# Altium PCB AbraSchematicVer5.PcbDoc
Units mil, origin at the board's own origin, x right, y up, seen from the top; angles counter-clockwise.
Board outline 3966.96 x 3797.83 mil, 2 copper layers (Top, Bottom), stack 61.811 mil thick; 89 components, 89 nets, 470 pads, 123 vias.
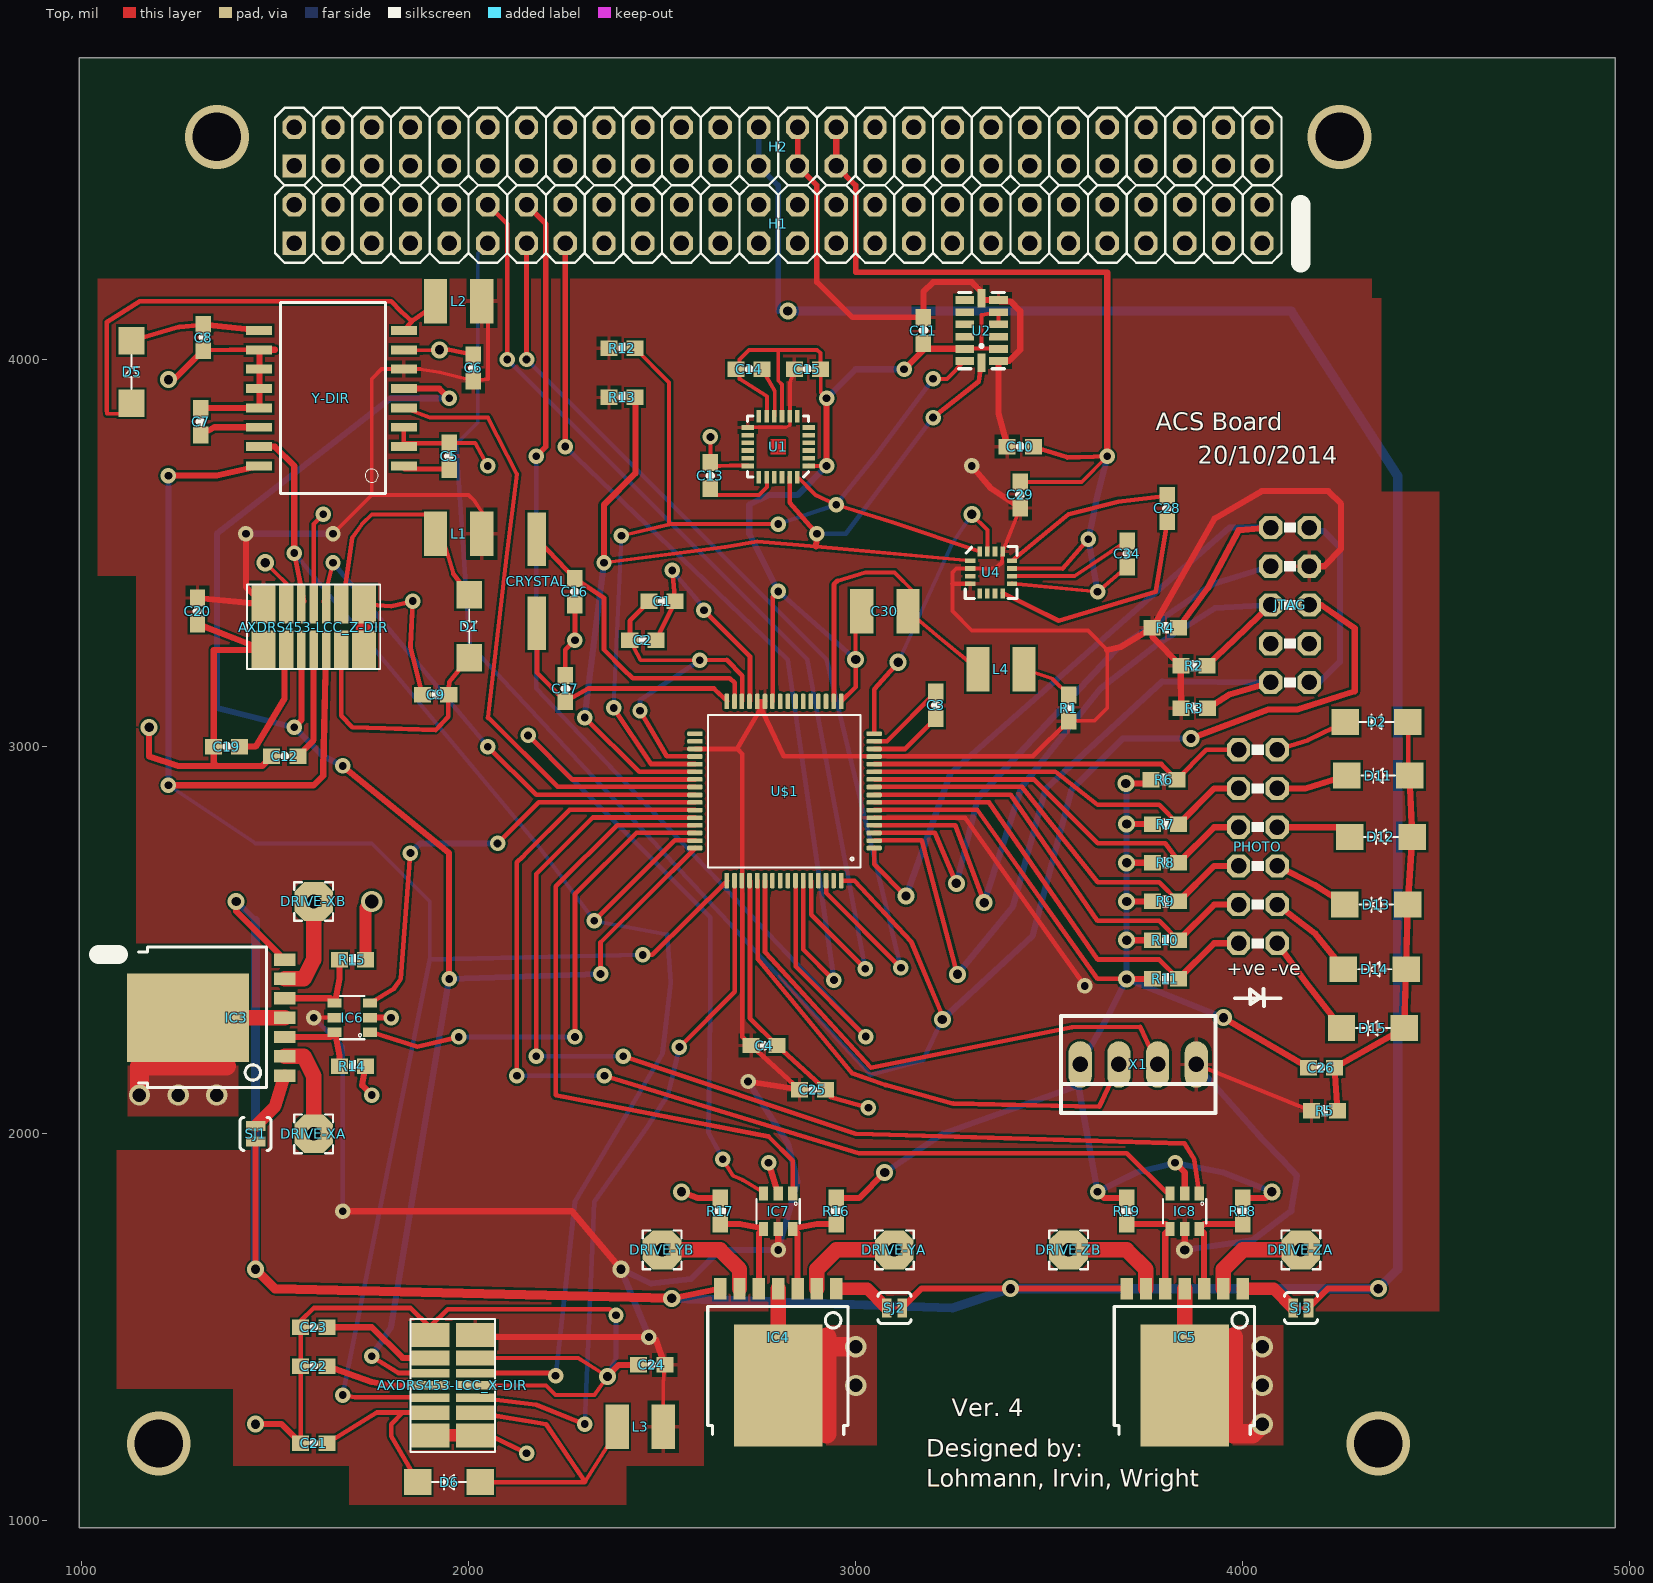
[diagram p0: Top view]
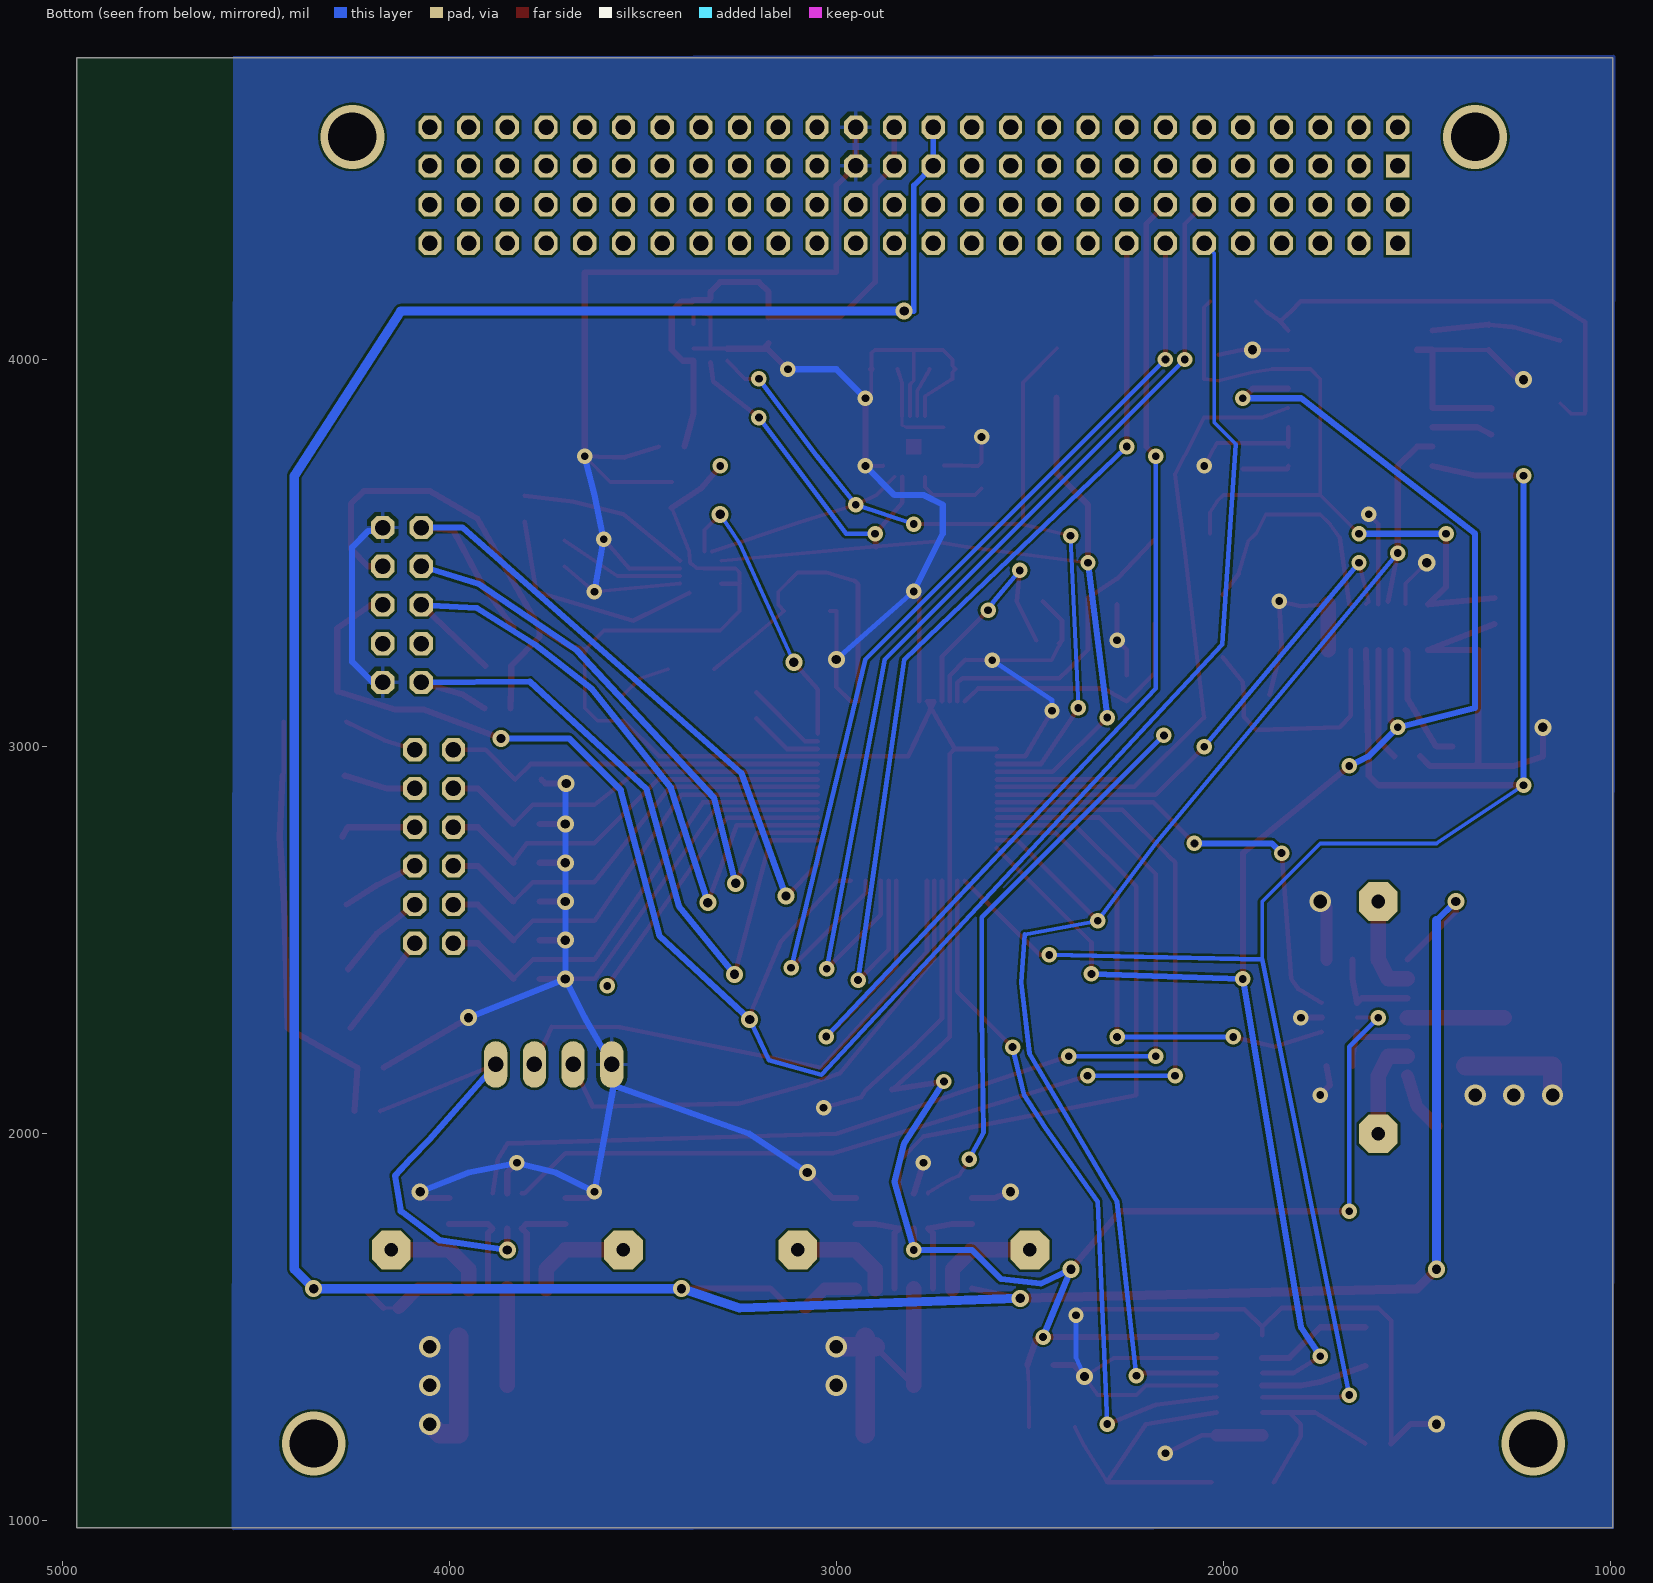
[diagram p1: Bottom view, seen from below]

## Layer stack, top to bottom
Top Solder: solder mask 0.4, Solder Resist, Dk 3.5
Top: signal copper 1.378
Dielectric 1: core 59.0551, FR-4, Dk 4.8
Bottom: signal copper 1.378
Bottom Solder: solder mask 0.4, Solder Resist, Dk 3.5

## Board outline
995,982.17 4961.96,982.17 4961.96,4780 995,4780

## Design rules (kind name [scope] priority, off if disabled: settings)
Clearance mdViaVia [IsVia vs IsVia] p1: gap=8
Clearance mdPadVia [IsPad vs IsVia] p2: gap=8
Clearance mdPadPad [IsPad vs IsPad] p3: gap=6
Clearance mdWireVia [(InLayerClass('Signal Layers') AND IsTrack) vs IsVia] p4: gap=8
Clearance mdWirePad [(InLayerClass('Signal Layers') AND IsTrack) vs IsPad] p5: gap=6
Clearance mdWireWire [(InLayerClass('Signal Layers') AND IsTrack) vs (InLayerClass('Signal Layers') AND IsTrack)] p6: gap=6
Clearance [All] p7: gap=6
HoleSize [All] p1: absolutevalues=TRUE maxlimit=100000 minlimit=15 maxpercent=80.000 minpercent=20.000
HoleToHoleClearance [All] p1: gap=8 allowstackedmicrovias=TRUE
PolygonConnect ThermalVias [IsVia] p1: connectstyle=Direct reliefconductorwidth=10 reliefentries=4 polygonreliefangle="90 Angle" airgapwidth=10
PolygonConnect [All] p2: connectstyle=Relief reliefconductorwidth=10 reliefentries=4 polygonreliefangle="90 Angle" airgapwidth=10
RoutingVias [All] p1: holewidth=28 width=50 viastyle="Through Hole" minholewidth=28 minwidth=50 maxholewidth=28 maxwidth=50
SilkToSilkClearance [All] p1 off: silktosilkclearance=10
SilkToSolderMaskClearance [IsPad] p1 off: minsilkscreentomaskgap=10 clearancetoexposedcopper=TRUE
SolderMaskExpansion [All] p1: expansion=4
Width [All] p1: maxlimit=100000 minlimit=8 preferedwidth=10
25 further rules are at their usual default settings.

## Components (designator, comment, footprint, x,y, rotation, side; value= is the part's Value field where it differs from the comment)
AXDRS453-LCC_X-DIR "" ADX-VERT 1850,1350 r270 top
AXDRS453-LCC_Z-DIR "" ADX-VERT 1600,3200 r0 top
C1 "470pF" 0603-CAP 2500,3375 r0 top
C2 "2.2uF" 0603-CAP 2450,3275 r0 top
C3 "0.1uF" 0603-CAP 3207,3107 r270 top
C4 "4.7uF" 0603-CAP 2764,2228 r180 top
C5 "1uF" 0603-CAP 1950,3750 r90 top
C6 "1uF" 0603-CAP 2012,3978 r90 top
C7 "1uF" 0603-CAP 1308,3839 r90 top
C8 "100nF" 0603-CAP 1315,4057 r270 top
C9 "100nF" 0603-CAP 1915,3134 r0 top
C10 "0.1uF" 0603-CAP 3425,3775 r0 top
C11 "0.1uF" 0603-CAP 3175,4075 r270 top
C12 "1uF" 0603-CAP 1525,2975 r0 top
C13 "2.2nF" 0603-CAP 2625,3700 r90 top
C14 "0.1uF" 0603-CAP 2725,3975 r180 top
C15 "10nF" 0603-CAP 2875,3975 r0 top
C16 "470pF" 0603-CAP 2275,3400 r90 top
C17 "2.2uF" 0603-CAP 2250,3150 r270 top
C19 "1uF" 0603-CAP 1375,3000 r0 top
C20 "1uF" 0603-CAP 1300,3350 r90 top
C21 "100nF" 0603-CAP 1600,1200 r0 top
C22 "1uF" 0603-CAP 1600,1400 r0 top
C23 "1uF" 0603-CAP 1600,1500 r0 top
C24 "1uF" 0603-CAP 2473,1403 r0 top
C25 "1nF" 0603-CAP 2889,2114 r180 top
C26 "0.1uF" 0603-CAP 4203,2171 r0 top
C28 "0.22uF" 0603-CAP 3805,3615 r90 top
C29 "0.1uF" 0603-CAP 3425,3650 r90 top
C30 "47uF" C1210K 3075,3350 r0 top
C34 "4.7uF" 0603-CAP 3702,3498 r270 top
CRYSTAL "" CSM-3X_SMD 2200,3250 r90 top
D1 "GF1" SMA-DO214AC 2002,3311 r270 top
D2 "" SMA-DO214AC 4346,3064 r180 top
D5 "GF1" SMA-DO214AC 1130,3968 r90 top
D6 "" SMA-DO214AC 1950,1100 r180 top
D11 "" SMA-DO214AC 4350,2925 r180 top
D12 "" SMA-DO214AC 4357,2767 r180 top
D13 "" SMA-DO214AC 4345,2592 r180 top
D14 "" SMA-DO214AC 4341,2425 r180 top
D15 "" SMA-DO214AC 4336,2273 r180 top
DRIVE-XA "" PAD-22G 1600,2000 r180 top
DRIVE-XB "" PAD-22G 1600,2600 r0 top
DRIVE-YA "" PAD-22G 3100,1700 r270 top
DRIVE-YB "" PAD-22G 2500,1700 r90 top
DRIVE-ZA "" PAD-22G 4150,1700 r270 top
DRIVE-ZB "" PAD-22G 3550,1700 r90 top
H1 "PINHD-2X26" HEADER-2X26 2750,4350 r0 top
H2 "PINHD-2X26" HEADER-2X26 2750,4550 r0 top
IC3 "BD6212HFP" HRP7 1325,2300 r90 top
IC4 "BD6212HFP" HRP7 2800,1400 r180 top
IC5 "BD6212HFP" HRP7 3850,1400 r180 top
IC6 "SN74LVC1G18-SOT23" SOT23-6 1700,2300 r90 top
IC7 "SN74LVC1G18-SOT23" SOT23-6 2800,1800 r180 top
IC8 "SN74LVC1G18-SOT23" SOT23-6 3850,1800 r180 top
JTAG "" FE05-2W 4122,3366 r90 top
L1 "470uH" C1210K 1975,3550 r180 top
L2 "470uH" C1210K 1975,4150 r180 top
L3 "470uH" C1210K 2443,1243 r0 top
L4 "470uH" C1210K 3375,3200 r0 top
PHOTO "" FE06-2W 4039,2742 r270 top
R1 "100" 0603-RES 3550,3100 r270 top
R2 "4.7k" 0603-RES 3874,3209 r180 top
R3 "4.7k" 0603-RES 3875,3099 r180 top
R4 "4.7k" 0603-RES 3800,3307 r180 top
R5 "15K" 0603-RES 4211,2059 r0 top
R6 "15k" 0603-RES 3796,2915 r0 top
R7 "15k" 0603-RES 3800,2800 r0 top
R8 "15k" 0603-RES 3800,2700 r0 top
R9 "15k" 0603-RES 3800,2600 r0 top
R10 "15k" 0603-RES 3800,2500 r0 top
R11 "15k" 0603-RES 3800,2400 r0 top
R12 "4.7k" 0603-RES 2397,4029 r180 top
R13 "4.7k" 0603-RES 2397,3902 r180 top
R14 "4.7k" 0603-RES 1700,2175 r0 top
R15 "4.7k" 0603-RES 1700,2450 r0 top
R16 "4.7k" 0603-RES 2950,1800 r90 top
R17 "4.7k" 0603-RES 2650,1800 r90 top
R18 "4.7k" 0603-RES 4000,1800 r90 top
R19 "4.7k" 0603-RES 3700,1800 r90 top
SJ1 "SOLDERJUMPERTRACE" SJ_2S-TRACE 1450,2000 r270 top
SJ2 "SOLDERJUMPERTRACE" SJ_2S-TRACE 3100,1550 r0 top
SJ3 "SOLDERJUMPERTRACE" SJ_2S-TRACE 4150,1550 r0 top
U1 "ITG-3200" QFN-24 2800,3775 r180 top
U2 "ADXL345" LGA14 3325,4075 r270 top
U4 "HMC5883LSMD" 16LPCC 3350,3450 r0 top
U$1 "" TQFP64-CORRECT 2816,2885 r180 top
X1 "" 22-23-2041 3730,2179 r180 top
Y-DIR "" N5 1650,3900 r90 top

## Footprints (in the part's own frame and the unit in brackets; to place one, negate y for a bottom-side part, rotate by r counter-clockwise, add the part's x,y. Pads: shape width x height; smd on the part's side, far side on the other; paste and mask are expansions set on the pad)
16LPCC [mil] "16LPCC"
  rect 26x12 smd: 1(-53.94,30) 2(-53.94,10) 3(-53.94,-9.84) 4(-53.94,-29.53) 9(54,-29.53) 10(54,-9.84) 11(54,10) 12(54,30)
  rect 12x26 smd: 5(-29.53,-53.94) 6(-9.84,-53.94) 7(10,-53.94) 8(30,-53.94) 13(30,54) 14(10,54) 15(-9.84,54) 16(-29.53,54)
  silkscreen extent -67,-67 67,67
22-23-2041 [mil] "22-23-2041"
  oval 60x120 hole 40: 1(-150,0) 2(-50,0) 3(50,0) 4(150,0)
  silkscreen extent -200,-125 200,125
0603-CAP [mil] "0603-CAP"
  rect 44x40 smd: 1(-33.46,0) 2(34,0)
  silkscreen extent 0,-1 0,2
0603-RES [mil] "0603-RES"
  rect 44x40 smd: 1(-33.46,0) 2(34,0)
  silkscreen extent -9,-15 9,15
ADX-VERT [mil] "ADX-VERT"
  rect 62x101 smd: 1(-129.92,50) 7(130,50) 8(130,168) 14(-129.92,168)
  rect 38x101 smd: 2(-70.87,50) 6(71,50) 9(71,168) 13(-70.87,168)
  rect 22x101 smd: 3(-31.5,50) 4(0,50) 5(32,50) 10(32,168) 11(0,168) 12(-31.5,168)
  silkscreen extent -172,0 172,219
C1210K [mil] "C1210K"
  rect 60x115 smd: 1(-59.06,0) 2(60,0)
CSM-3X_SMD [mil] "CSM-3X_SMD"
  rect 138x48 smd: P$1(286,24) P$2(69,24)
FE05-2W [mil] "FE05-2W"
  oct 60x60 hole 40: 1(-200,50) 2(-200,-50) 3(-100,50) 4(-100,-50) 5(0,50) 6(0,-50) 7(100,50) 8(100,-50) 9(200,50) 10(200,-50)
  silkscreen extent -213,-16 213,16
FE06-2W [mil] "FE06-2W"
  oct 60x60 hole 40: 1(-250,50) 2(-250,-50) 3(-150,50) 4(-150,-50) 5(-50,50) 6(-50,-50) 7(50,50) 8(50,-50) 9(150,50) 10(150,-50) 11(250,50) 12(250,-50)
  silkscreen extent -263,-16 263,16
HEADER-2X26 [mil] "HEADER-2X26"
  rect 60x60 hole 40: 1(-1200,-50)
  oct 60x60 hole 40: 2(-1200,50) 3(-1100,-50) 4(-1100,50) 5(-1000,-50) 6(-1000,50) 7(-900,-50) 8(-900,50) 9(-800,-50) 10(-800,50) 11(-700,-50) 12(-700,50) 13(-600,-50) 14(-600,50) 15(-500,-50) 16(-500,50) 17(-400,-50) 18(-400,50) 19(-300,-50) 20(-300,50) 21(-200,-50) 22(-200,50) 23(-100,-50) 24(-100,50) 25(0,-50) 26(0,50) 27(100,-50) 28(100,50) 29(200,-50) 30(200,50) 31(300,-50) 32(300,50) 33(400,-50) 34(400,50) 35(500,-50) 36(500,50) 37(600,-50) 38(600,50) 39(700,-50) 40(700,50) 41(800,-50) 42(800,50) 43(900,-50) 44(900,50) 45(1000,-50) 46(1000,50) 47(1100,-50) 48(1100,50) 49(1200,-50) 50(1200,50) 51(1300,-50) 52(1300,50)
  silkscreen extent -1250,-100 1350,100
HRP7 [mil] "HRP7"
  rect 32x56 smd: 1(-150,-200) 2(-100,-200) 3(-50,-200) 4(0,-200) 5(50,-200) 6(100,-200) 7(150,-200)
  rect 229x315 smd: P(0,50)
  silkscreen extent -180,-154 182,177
LGA14 [mil] "LGA14"
  rect 20x48 smd: 1(79,44) 2(48,44) 3(16,44) 4(-15.75,44) 5(-47.24,44) 6(-78.74,44) 8(-78.74,-43.31) 9(-47.24,-43.31) 10(-15.75,-43.31) 11(16,-43.31) 12(48,-43.31) 13(79,-43.31)
  rect 48x20 smd: 7(-82.68,0) 14(83,0)
  silkscreen extent -98,-59 99,60
N5 [mil] "N5"
  rect 23x67 smd: 1(-175,-182.87) 2(-125,-182.87) 3(-75,-182.87) 4(-25,-182.87) 5(25,-182.87) 6(75,-182.87) 7(125,-182.87) 8(175,-182.87) 9(175,191) 10(125,191) 11(75,191) 12(25,191) 13(-25,191) 14(-75,191) 15(-125,191) 16(-175,191)
  silkscreen extent -246,-136 247,136
PAD-22G [mil] "PAD-22G"
  oct 100x100 hole 35: 1(0,0)
  silkscreen extent -50,-50 50,50
QFN-24 [mil] "QFN-24"
  rect 32x12 smd: 1(-78.74,50) 2(-78.74,30) 3(-78.74,10) 4(-78.74,-9.84) 5(-78.74,-29.53) 6(-78.74,-49.21) 13(79,-49.21) 14(79,-29.53) 15(79,-9.84) 16(79,10) 17(79,30) 18(79,50)
  rect 12x32 smd: 7(-49.21,-78.74) 8(-29.53,-78.74) 9(-9.84,-78.74) 10(10,-78.74) 11(30,-78.74) 12(50,-78.74) 19(50,79) 20(30,79) 21(10,79) 22(-9.84,79) 23(-29.53,79) 24(-49.21,79)
  Top region: -19.68,-19.68 20,-19.68 20,20 -19.68,20
  silkscreen extent -79,-79 79,79
SJ_2S-TRACE [mil] "SJ_2S-TRACE"
  rect 25x50 smd: 1(-20,0) 2(20,0)
  Top lines w8: 15,0 -15,0
  silkscreen extent -43,-40 43,40
SMA-DO214AC [mil] "SMA-DO214AC"
  rect 71x67 smd: A(-80.71,0) K(81,0)
  silkscreen extent -44,-19 44,19
SOT23-6 [mil] "SOT23-6"
  rect 24x36 smd: 1(-37.4,-45.28) 2(0,-45.28) 3(38,-45.28) 4(38,46) 5(0,46) 6(-37.4,46)
  silkscreen extent -56,-31 56,31
TQFP64-CORRECT [mil] "TQFP64-CORRECT"
  rrect50% 40x12 smd: 1(-231.69,147) 2(-231.69,128) 3(-231.69,108) 4(-231.69,88) 5(-231.69,69) 6(-231.69,49) 7(-231.69,29) 8(-231.69,10) 9(-231.69,-10.63) 10(-231.69,-30.32) 11(-231.69,-50) 12(-231.69,-69.68) 13(-231.69,-89.37) 14(-231.69,-109.06) 15(-231.69,-128.74) 16(-231.69,-148.43) 33(231,-148.43) 34(231,-128.74) 35(231,-109.06) 36(231,-89.37) 37(231,-69.68) 38(231,-50) 39(231,-30.32) 40(231,-10.63) 41(231,10) 42(231,29) 43(231,49) 44(231,69) 45(231,88) 46(231,108) 47(231,128) 48(231,147)
  rrect50% 12x40 smd: 17(-146.85,-231.69) 18(-127.17,-231.69) 19(-107.48,-231.69) 20(-87.8,-231.69) 21(-68.11,-231.69) 22(-48.43,-231.69) 23(-28.74,-231.69) 24(-9.06,-231.69) 25(11,-231.69) 26(31,-231.69) 27(50,-231.69) 28(70,-231.69) 29(90,-231.69) 30(110,-231.69) 31(129,-231.69) 32(149,-231.69) 49(149,231) 50(129,231) 51(110,231) 52(90,231) 53(70,231) 54(50,231) 55(31,231) 56(11,231) 57(-9.06,231) 58(-28.74,231) 59(-48.43,231) 60(-68.11,231) 61(-87.8,231) 62(-107.48,231) 63(-127.17,231) 64(-146.85,231)
  silkscreen extent -197,-197 197,197

## Part data
AXDRS453-LCC_X-DIR AXDRS453-LCC_Z-DIR: library part ADX-VERT
C1 C2 C3 C4 C5 C6 C7 C8 C9 C10 C11 C12 C13 C14 C15 C16 C17 C19 C20 C21 C22 C23 C24 C25 C26 C28 C29 C34: library part 0603-CAP
C30 L1 L2 L3 L4: library part C1210K
CRYSTAL: library part CSM-3X_SMD
D1 D2 D5 D6 D11 D12 D13 D14 D15: library part SMA-DO214AC
DRIVE-XA DRIVE-XB DRIVE-YA DRIVE-YB DRIVE-ZA DRIVE-ZB: library part PAD-22G
H1 H2: library part HEADER-2X26
IC3 IC4 IC5: library part HRP7
IC6 IC7 IC8: library part SOT23-6
JTAG: library part FE05-2W
PHOTO: library part FE06-2W
R1 R2 R3 R4 R5 R6 R7 R8 R9 R10 R11 R12 R13 R14 R15 R16 R17 R18 R19: library part 0603-RES
SJ1 SJ2 SJ3: library part SJ_2S-TRACE
U1: library part QFN-24
U2: library part LGA14
U4: library part 16LPCC
U$1: library part TQFP64-CORRECT
X1: library part 22-23-2041
Y-DIR: library part N5

## Via types
v1: diameter 40/40 (per signal layer), hole 20, Top to Bottom, 77 vias
v2: diameter 44/44 (per signal layer), hole 24, Top to Bottom, 33 vias
v3: diameter 55/55 (per signal layer), hole 35, Top to Bottom, 9 vias
v4: diameter 165/165 (per signal layer), hole 125, Top to Bottom, 4 vias

## Nets (pads, with @x,y where several pads share a name; then routed paths per layer and width w, separated by ;. In a path a pad name is that pad's centre, name@x,y a point inside that pad or via, vN(x,y) a via of type N, cw(c..) or ccw(c..) an arc to the next point about the centre after c; other vN are vias at no path point)
3.3V: AXDRS453-LCC_X-DIR.14 AXDRS453-LCC_Z-DIR.14 C4.2 C6.1 C10.1 C11.1 C15.1 C20.2 C24.2 C25.2 C29.1 H2.27 H2.28 IC6.5 IC7.5 IC8.5 JTAG.8 L1.1 L2.1 L3.2 R1.2 R2.2 R3.2 R4.2 R5.1 R12.2 R13.2 U1.8 U1.13 U2.1 U2.6 U2.7 U4.2 U4.4 U4.13 U$1.5 U$1.13 U$1.27 U$1.28 U$1.35 U$1.51 X1.1 Y-DIR.6 | length 13700.9
  Top w8: U1.13@2722,3825 2820,3825 2830,3830 U1.8@2830,3854
  Top w10: v1(1600,2300) IC6.5@1655,2300 ; v1(1650,3550) 1750,3650 ; L1.1@2035,3550 2035,3605 2015,3636 2000,3650 1750,3650 ; L2.1@2035,4150 2050,4135 2050,4000 2050,3950 2012,3945 1925,3967 1875,3975 1833,3975 1775,3975 1750,3950 1750,3650 ; L3.2@2502,1243 2503,1353 C24.2@2506,1403 ; U1.8@2830,3854 2830,3938 C15.1@2842,3975 ; C29.1@3425,3617 U4.13 3378,3475 3361,3461 3342,3460 3297,3460 3260,3460 3250,3450 3250,3421 3250,3350 3300,3300 3600,3300 3650,3250 3650,3100 3617,3067 R1.2@3550,3067
  Top w12: U$1.35@2586,2994 2694,2994 ; C25.2@2856,2114 C4.2 2707,2250 2707,2654 2707,2981 2694,2994 ; U$1.5@3048,2817 3283,2816 v1(3592,2382) ; 3250,3421 U4.4@3297,3421 ; R1.2@3550,3067 3458,2975 3048,2975 2814,2975 2747,3117 2766,3117 2694,2994 ; X1.1 R5.1@4178,2059
  Top w14: H2.28 H2.27 2900,4450 2900,4200 2992,4109 C11.1@3175,4109
  Top w16: C20.2 1471,3368 1425,3413 v1(1425,3550) ; v1(1675,1800) 2267,1800 v2(2394,1650) ; AXDRS453-LCC_X-DIR.14@2018,1480 2023,1475 v1(2466,1475) 2484,1468 C24.2@2506,1403 ; v1(2722,2135) C25.2@2856,2114 ; v1(2800,1700) IC7.5@2800,1755 ; C11.1@3175,4109 3175,4175 3200,4200 3300,4200 3325,4175 3325,4158 3329,4154 3369,4154 3373,4150 3400,4150 3425,4125 3425,4025 3397,3997 3369,3997 3369,3860 C10.1@3392,3775 ; v1(3300,3725) 3350,3667 C29.1@3425,3617 ; 3650,3250 3684,3257 R4.2@3767,3307 ; R3.2@3842,3099 3840,3165 R2.2 3767,3283 R4.2@3767,3307 ; v2(3850,1700) IC8.5@3850,1755 ; JTAG.8 4210,3466 4254,3511 4254,3627 4221,3660 4049,3660 3927,3589 R4.2@3767,3307
  Bottom w12: v1(1600,2300) 1675,2225 v1(1675,1800)
  Bottom w16: v1(1425,3550) v1(1650,3550) ; v1(2466,1475) v2(2394,1650) 2472,1613 2575,1625 2650,1700 v1(2800,1700) 2850,1875 2825,1975 v1(2722,2135) ; v2(3850,1700) 4025,1725 4125,1800 4140,1892 4101,1934 4052,1984 X1.1
+5V: H2.25 H2.26 IC3.7 IC4.7 IC5.7 SJ1.2 SJ2.2 SJ3.2 | length 9808.6
  Top w16: v2(1400,2600) 1400,2575 IC3.7 ; v2(1450,1650) SJ1.2 ; v2(2525,1575) IC4.7 ; SJ2.2 3170,1600 v2(3400,1600) IC5.7 ; SJ3.2 4220,1600 v2(4350,1600)
  Top w24: v2(1450,1650) 1500,1600 v2(2525,1575)
  Bottom w14: H2.26 H2.25 2800,4450 2800,4125 v2(2825,4125)
  Bottom w16: v2(1400,2600) 1450,2550
  Bottom w24: v2(1450,1650) 1450,2550 ; v2(2525,1575) 3250,1550 v2(3400,1600) v2(4350,1600) 4400,1650 4400,3700 4125,4125 v2(2825,4125)
ACS_CS: H1.12 U$1.60 | length 2615.7
  Top w12: H1.12 2100,4350 v1(2100,4000) ; U$1.60@2885,2654 2885,2566 v1(3025,2426)
  Bottom w12: v1(2100,4000) 2875,3225 v1(3025,2426)
ACS_SCK: H1.13 U$1.62 | length 2519.8
  Top w12: v1(2150,4000) H1.13 ; U$1.62@2924,2654 2924,2622 v1(3117,2429)
  Bottom w12: v1(2150,4000) 2925,3225 v1(3117,2429)
ACS_SDI: H1.15 U$1.59 | length 2446.9
  Top w12: U$1.59@2865,2654 2865,2476 v1(2944,2397)
  Top w14: v1(2250,3775) H1.15
  Bottom w12: v1(2250,3775) 2825,3225 v1(2944,2397)
ACS_SDO: H1.14 U$1.58 | length 2996.9
  Top w12: U$1.58@2845,2654 2845,2432 v1(3026,2251)
  Top w14: H1.14 2200,4350 2200,3775 v1(2175,3750)
  Bottom w12: v1(2175,3750) 2175,3150 v1(3026,2251)
ADC0: PHOTO.12 R11.2 U$1.7 | length 1213
  Top w12: U$1.7@3048,2856 3345,2856 3625,2450 3784,2450 R11.2
  Top w16: R11.2 3926,2492 PHOTO.12
ADC1: PHOTO.10 R10.2 U$1.8 | length 1170.9
  Top w12: U$1.8@3048,2876 3400,2876 3625,2550 3784,2550 R10.2
  Top w16: R10.2 3926,2592 PHOTO.10
ADC2: PHOTO.8 R9.2 U$1.9 | length 1118.7
  Top w12: U$1.9@3048,2896 3430,2896 3625,2650 3784,2650 R9.2
  Top w16: R9.2 3926,2692 PHOTO.8
ADC3: PHOTO.6 R8.2 U$1.10 | length 1074.9
  Top w10: R8.2 3834,2701 R8.2@3834,2704
  Top w12: U$1.10@3048,2915 3461,2915 3625,2750 3800,2750 R8.2@3834,2704
  Top w16: R8.2 3926,2792 PHOTO.6
ADC4: PHOTO.4 R7.2 U$1.11 | length 1029
  Top w12: U$1.11@3048,2935 3516,2935 3625,2850 3784,2850 R7.2
  Top w16: R7.2 3926,2892 PHOTO.4
ADC5: PHOTO.2 R6.2 U$1.12 | length 989.8
  Top w12: U$1.12@3048,2955 3790,2955 3829,2915 3906,2992 PHOTO.2
CS-X: AXDRS453-LCC_X-DIR.10 U$1.50 | length 1819.4
  Top w12: AXDRS453-LCC_X-DIR.10@2018,1319 2175,1300 v1(2300,1250) ; v1(2545,2224) 2688,2367 U$1.50@2688,2654
  Bottom w12: v1(2300,1250) 2325,1825 2460,2015 2516,2103 v1(2545,2224)
CS-Y: U$1.40 Y-DIR.4 | length 1629
  Top w10: Y-DIR.4@1833,3875 1900,3850 2050,3850 2125,3704 2098,3490 2050,3075
  Top w12: 2050,3075 2053,3073 2230,2896 U$1.40@2586,2896
CS-Z: AXDRS453-LCC_Z-DIR.10 U$1.41 | length 1321.3
  Top w10: AXDRS453-LCC_Z-DIR.10 1625,3374 v1(1650,3475)
  Top w12: v1(2050,3000) 2175,2876 U$1.41@2586,2876
  Bottom w12: v1(1650,3475) v1(2050,3000)
DIR-X: IC6.1 U$1.46 | length 1283.5
  Top w12: IC6.1@1746,2263 1868,2225 v1(1975,2250) ; v1(2275,2250) 2275,2619 2434,2778 U$1.46@2586,2778
  Bottom w12: v1(1975,2250) v1(2275,2250)
DIR-Y: IC7.1 U$1.45 | length 1698.6
  Top w12: U$1.45@2586,2797 2384,2797 2225,2639 2225,2100 2775,1993 2838,1930 IC7.1@2838,1846
DIR-Z: IC8.1 U$1.44 | length 2787.1
  Top w12: v1(2175,2200) 2175,2671 2321,2817 U$1.44@2586,2817 ; v1(2400,2200) 3000,2000 3850,1975 3875,1933 IC8.1@3888,1846
  Bottom w12: v1(2175,2200) v1(2400,2200)
DRDY: U4.15 U$1.16 | length 748.3
  Top w10: v2(3300,3600) 3341,3560 U4.15@3341,3504
  Top w12: U$1.16@3048,3034 3048,3148 v2(3110,3218)
  Bottom w10: v2(3110,3218) 3250,3525 v2(3300,3600)
GND: AXDRS453-LCC_X-DIR.1 AXDRS453-LCC_X-DIR.7 AXDRS453-LCC_X-DIR.8 AXDRS453-LCC_X-DIR.11 AXDRS453-LCC_X-DIR.13 AXDRS453-LCC_Z-DIR.1 AXDRS453-LCC_Z-DIR.7 AXDRS453-LCC_Z-DIR.8 AXDRS453-LCC_Z-DIR.11 AXDRS453-LCC_Z-DIR.13 C1.1 C2.1 C4.1 C5.2 C6.2 C7.2 C8.2 C9.1 C10.2 C11.2 C12.1 C13.2 C14.2 C15.2 C16.1 C17.1 C19.1 C20.1 C21.1 C22.1 C23.1 C24.1 C25.1 C26.1 C29.2 C30.1 C34.2 H2.29 H2.30 IC3.4 IC3.P IC4.4 IC4.P IC5.4 IC5.P IC6.2 IC7.2 IC8.2 JTAG.2 JTAG.10 R6.1 R7.1 R8.1 R9.1 R10.1 R11.1 R14.2 R15.2 R16.2 R17.2 R18.2 R19.2 U1.1 U1.9 U1.11 U1.18 U2.2 U2.4 U2.5 U2.12 U4.9 U4.11 U$1.6 U$1.17 U$1.26 U$1.30 U$1.36 U$1.52 X1.4 Y-DIR.2 Y-DIR.3 Y-DIR.7 Y-DIR.10 Y-DIR.11 Y-DIR.12 Y-DIR.13 | length 20760.7
  Top w10: v2(1475,3475) 1530,3421 AXDRS453-LCC_Z-DIR.13@1530,3368 ; Y-DIR.7@1833,4025 1882,4024 v2(1925,4025) ; C5.2 2017,3784 v1(2050,3725) ; AXDRS453-LCC_X-DIR.11 2200,1350 2225,1325 2325,1325 v2(2359,1373) 2282,1421 AXDRS453-LCC_X-DIR.13@2018,1421 ; C2.1@2417,3275 2445,3223 v1(2597,3223) 2598,3224 2667,3224 ; v1(2625,3800) C13.2 2634,3725 2650,3725 2675,3726 2722,3726 2700,3726 ; U1.11@2771,3854 2771,3905 2700,3950 2700,3967 2692,3975 2700,3984 2700,4000 2725,4025 2800,4025 ; U1.9@2810,3854 2810,3935 2800,3945 2800,4025 ; U1.1@2879,3726 2880,3725 v1(2925,3725) ; C15.2 2909,4017 2900,4025 2800,4025 ; C15.2@2910,3975 2910,3915 v1(2925,3900) ; v2(3000,3225) 3000,3350 C30.1@3016,3350 ; U2.12@3282,4028 3325,4028 ; U2.2@3369,4028 3325,4028 ; U2.4@3369,4091 3369,4123 3325,4115 3325,4028 ; U4.9@3404,3421 v1(3625,3400) C34.2@3702,3465 ; U4.11 3535,3460 ; C29.2 3584,3684 v1(3650,3750)
  Top w12: C8.2@1315,4024 1384,4025 1500,4025 ; C21.1@1567,1200 1567,1400 1567,1500 1567,1517 1600,1550 1850,1550 AXDRS453-LCC_X-DIR.1@1900,1501 ; AXDRS453-LCC_Z-DIR.11 1600,3575 v1(1625,3600) ; AXDRS453-LCC_Z-DIR.8 1800,3363 v1(1856,3376) 1850,3259 C9.1@1881,3134 ; Y-DIR.3@1833,3825 1833,3775 1834,3784 C5.2 ; AXDRS453-LCC_X-DIR.1@1900,1480 AXDRS453-LCC_X-DIR.1@1900,1501 ; v2(1925,4025) 1950,4025 C6.2 ; AXDRS453-LCC_X-DIR.8@2018,1221 2055,1221 v1(2150,1175) ; C17.1@2250,3184 2250,3250 v1(2275,3275) C16.1@2275,3367 ; v1(2381,1531) 2365,1547 1946,1547 AXDRS453-LCC_X-DIR.1@1900,1501 ; C2.1@2425,3267 2417,3275 2417,3325 C1.1@2467,3375 ; v1(2443,3093) 2512,2975 U$1.36@2586,2975 ; 2667,3224 2707,3183 U$1.30@2707,3117 ; U$1.52@2727,2654 2727,2298 2797,2228 2923,2114 2936,2094 v1(3033,2067) ; U$1.26@2786,3117 2786,3387 v1(2800,3401) ; U$1.17@2963,3117 3000,3154 v2(3000,3225) v2@2988,3218 ; U$1.6@3048,2837 3314,2837 3625,2400 v2(3700,2400) ; C10.2 3547,3747 3615,3749 v1(3650,3750) ; 3535,3460 v1(3601,3536) ; AXDRS453-LCC_X-DIR.1@1900,1501 1900,1500 AXDRS453-LCC_X-DIR.1@1900,1501
  Top w14: H2.29 3000,4450 3000,4225 3650,4225
  Top w16: v2(1175,3050) 1175,2975 1250,2950 1350,2950 ; v2(1225,3948) 1239,3948 C8.2@1315,4024 ; C20.1@1300,3317 1471,3250 1342,3250 1342,3000 1342,2959 1350,2950 ; C7.2 1308,3875 1460,3875 1460,3925 1460,3975 1460,4025 1500,4025 ; v2(1450,1250) 1517,1250 C21.1@1567,1200 ; C12.1@1492,2975 1467,2950 1350,2950 ; R14.2 1725,2125 v1(1750,2100) ; IC6.2@1746,2300 v1(1800,2300) ; v2(2359,1373) 2388,1403 C24.1@2439,1403 ; v2(2550,1850) 2592,1834 R17.2 ; v1(2775,1925) IC7.2@2800,1846 ; IC4.P 2900,1450 2950,1450 ; C15.2 C15.2@2910,3975 ; v1(2925,3725) v1(2925,3900) ; R16.2 3009,1834 v2(3075,1900) ; H2.29 H2.30 ; v1(3125,3975) 3178,4028 C11.2@3189,4028 ; C11.2@3175,4042 C11.2@3189,4028 ; U2.12@3282,4028 C11.2@3189,4028 ; v1(3625,1850) 3642,1834 R19.2 ; v1(3650,3750) 3650,4225 ; v2(3698,2905) 3752,2905 R6.1@3762,2915 ; v2(3700,2400) R11.1@3767,2400 ; v2(3700,2500) R10.1@3767,2500 ; v2(3700,2600) R9.1@3767,2600 ; v2(3700,2700) R8.1@3767,2700 ; v2(3700,2800) R7.1@3767,2800 ; v1(3825,1925) 3850,1900 IC8.2@3850,1846 ; v2(3950,2300) C26.1@4170,2171 ; R18.2 4059,1834 v2(4075,1850)
  Top w32: R15.2 1734,2584 v3(1750,2600) ; AXDRS453-LCC_X-DIR.7@1900,1221 AXDRS453-LCC_X-DIR.8@2018,1221
  Top w40: IC3.P IC3.4 ; AXDRS453-LCC_Z-DIR.7 AXDRS453-LCC_Z-DIR.8 ; IC4.P IC4.4 ; IC5.P IC5.4
  Top w50: v3(1150,2100) 1150,2175 1375,2175 ; IC4.P@2900,1450 2925,1450 ; 2925,1225 2925,1450 ; 2925,1475 2925,1450 ; v3(3000,1450) 2950,1450 2925,1450 ; 3975,1475 3975,1225 4025,1225 v3(4050,1250)
  Bottom w12: v2(2359,1373) 2381,1422 v1(2381,1531) ; v1(2443,3093) 2443,3121 v1(2597,3223) ; v1(2800,3401) v2(3000,3225)
  Bottom w16: v1(2800,3401) 2725,3550 2725,3625 2775,3650 2850,3650 v1(2925,3725) ; v1(2925,3900) 3000,3975 v1(3125,3975) ; v2(3075,1900) 3225,2000 X1.4@3575,2125 ; v1(3625,3400) v1(3601,3536) 3625,3650 v1(3650,3750) ; v2(3698,2905) 3700,2902 v2(3700,2800) v2(3700,2700) v2(3700,2600) v2(3700,2500) v2(3700,2400) ; v2(3950,2300) v2(3700,2400) ; v2(4075,1850) 3950,1900 v1(3825,1925) 3725,1900 v1(3625,1850) X1.4@3575,2125 ; JTAG.2 4198,3166 4251,3219 4251,3515 4209,3557 4182,3557 JTAG.10 ; X1.4@3575,2125 X1.4 3650,2300 v2(3700,2400)
  other v3: 3000,1350 4050,1350 4050,1450 1250,2100 1350,2100
MISO: AXDRS453-LCC_X-DIR.3 AXDRS453-LCC_Z-DIR.3 U$1.48 Y-DIR.5 | length 4536.6
  Top w12: v1(1750,1425) 1819,1382 AXDRS453-LCC_X-DIR.3@1900,1382 ; v1(2341,2413) 2341,2494 U$1.48@2586,2738
  Top w16: v1(1550,3050) 1569,3069 AXDRS453-LCC_Z-DIR.3@1569,3250 ; v1(1675,2950) 1950,2725 v1(1950,2400) ; Y-DIR.5@1833,3925 1925,3925 v1(1950,3900)
  Bottom w16: v1(1675,2950) 1625,2975 v1(1550,3050) 1350,3100 1350,3550 1800,3900 v1(1950,3900) ; v1(1750,1425) 1800,1500 v1(1950,2400) v1(2341,2413)
MOSI: AXDRS453-LCC_X-DIR.12 AXDRS453-LCC_Z-DIR.12 U$1.47 Y-DIR.15 | length 3649
  Top w12: v1(1550,3500) AXDRS453-LCC_Z-DIR.12@1575,3374 ; AXDRS453-LCC_X-DIR.12@2018,1382 2225,1382 v1(2225,1375) ; v1(2325,2550) 2533,2758 U$1.47@2586,2758
  Top w16: Y-DIR.15@1460,3775 1500,3775 1550,3725 v1(1550,3500)
  Bottom w10: v1(1550,3500) 2175,2750 v1(2325,2550) 2513,2515
  Bottom w12: v1(2225,1375) 2275,1825 2501,2207 2522,2391 2513,2515
N$1: C13.1 U1.20 | length 187.7
  Top w10: C13.1@2625,3667 2642,3650 2750,3650 2771,3671 U1.20@2771,3697
N$2: C26.2 D2.A D11.A D12.A D13.A D14.A D15.A R5.2 | length 1112.3
  Top w12: D2.A@4427,3064 4427,2930 D11.A@4431,2925
  Top w16: R5.2 C26.2 4417,2273 4422,2425 4426,2592 4438,2767 D11.A@4431,2925
N$3: AXDRS453-LCC_Z-DIR.9 D1.A L1.2 | length 637.1
  Top w10: 1700,3540 1725,3575 1750,3600 1891,3600 1916,3550 1936,3531 1961,3446
  Top w12: AXDRS453-LCC_Z-DIR.9 1675,3368 1700,3540 ; 1961,3446 D1.A@2002,3392
N$4: AXDRS453-LCC_Z-DIR.6 C9.2 D1.K | length 646.7
  Top w12: AXDRS453-LCC_Z-DIR.6 1671,3080 1700,3050 1915,3043 1948,3077 1948,3134 1950,3167 D1.K@2002,3231
N$5: D2.K PHOTO.1 | length 191.6
  Top w12: PHOTO.1 4169,3017 D2.K@4266,3064
N$6: C7.1 Y-DIR.14 | length 156.7
  Top w16: C7.1@1308,3806 1344,3825 Y-DIR.14@1460,3825
N$7: C30.2 L4.1 U$1.18 | length 826.7
  Top w10: 2953,3428 3025,3450 3100,3450 3150,3400 3150,3366 C30.2 3216,3282 L4.1@3316,3200
  Top w12: U$1.18@2944,3117 2944,3419 2953,3428
N$8: C1.2 C2.2 U$1.29 | length 609.8
  Top w12: C2.2 C1.2 v1(2526,3455) ; v1@2609,3351 v1(2608,3352) 2727,3233 U$1.29@2727,3117
  Bottom w12: v1(2526,3455) 2593,3376 v1(2608,3352)
N$9: L4.2 R1.1 | length 136.1
  Top w10: L4.2 3509,3175 R1.1@3550,3134
N$10: C14.1 U1.10 | length 129.5
  Top w10: C14.1@2759,3975 2791,3919 U1.10@2791,3854
N$11: IC3.1 SJ1.1 | length 154.5
  Top w32: SJ1.1 1500,2070 IC3.1
N$12: IC4.1 SJ2.1 | length 150.7
  Top w32: IC4.1 3030,1600 SJ2.1
N$13: D5.A L2.2 Y-DIR.8 | length 1248
  Top w10: 1066,3866 1066,3860 1102,3860 D5.A@1130,3887 ; L2.2@1888,4123 1891,4125 L2.2@1916,4150
  Top w12: 1066,3866 1066,4097 1150,4150 1800,4150 1825,4125 1854,4099 ; Y-DIR.8@1833,4075 1854,4099 ; L2.2@1888,4123 1854,4099
N$14: C16.2 CRYSTAL.P$1 U$1.31 | length 786.2
  Top w12: CRYSTAL.P$1@2177,3536 2184,3529 C16.2 2350,3384 2350,3250 2400,3200 2424,3177 2675,3177 2688,3165 U$1.31@2688,3117
N$15: C17.2 CRYSTAL.P$2 U$1.32 | length 671.9
  Top w12: CRYSTAL.P$2@2177,3319 2177,3191 2250,3117 2309,3150 2634,3150 U$1.32@2668,3117
N$16: C3.1 U$1.15 | length 211.2
  Top w12: U$1.15@3048,3014 3081,3014 C3.1@3207,3140
N$17: IC5.1 SJ3.1 | length 150.7
  Top w32: IC5.1 4080,1600 SJ3.1
N$18: IC3.3 IC6.6 R14.1 | length 224.8
  Top w16: IC3.3 1643,2250 1655,2263 1667,2201 R14.1@1667,2175
N$19: IC3.5 IC6.4 R15.1 | length 248.1
  Top w16: IC3.5 1643,2350 1655,2338 1667,2400 R15.1@1667,2450
N$20: IC4.3 IC7.6 R16.1 | length 273.1
  Top w16: IC4.3 2850,1743 2838,1755 2900,1767 R16.1@2950,1767
N$21: IC4.5 IC7.4 R17.1 | length 274.8
  Top w16: R17.1@2650,1767 2701,1767 2763,1755 2750,1743 IC4.5
N$22: IC5.3 IC8.6 R18.1 | length 276.9
  Top w16: IC5.3 3900,1743 3888,1755 3900,1767 R18.1@4000,1767
N$23: IC5.5 IC8.4 R19.1 | length 278.7
  Top w16: R19.1@3700,1767 3801,1767 3813,1755 3800,1743 IC5.5
N$24: C3.2 U$1.14 | length 191.7
  Top w12: U$1.14@3048,2994 3128,2994 C3.2
N$25: 
  other v4: 1350,4575
N$26: 
  other v4: 4250,4575
N$27: AXDRS453-LCC_X-DIR.9 D6.A L3.1 | length 799.5
  Top w10: 2301,1101 2358,1192 L3.1@2384,1243
  Top w12: AXDRS453-LCC_X-DIR.9@2018,1280 2171,1255 2200,1250 2301,1101 2300,1100 D6.A@2031,1100
N$28: AXDRS453-LCC_X-DIR.6 C21.2 D6.K | length 500.1
  Top w12: C21.2 1763,1280 1830,1280 ; D6.K@1870,1100 1800,1220 1800,1250 1830,1280 ; AXDRS453-LCC_X-DIR.6@1900,1280 1830,1280
N$29: C5.1 Y-DIR.1 | length 124.1
  Top w12: Y-DIR.1@1833,3725 1834,3717 C5.1@1950,3717
N$30: DRIVE-XA.1 IC3.2 | length 255.9
  Top w40: IC3.2 1575,2200 1600,2150 DRIVE-XA.1
N$31: DRIVE-XB.1 IC3.6 | length 255.9
  Top w40: IC3.6 1575,2400 1600,2450 DRIVE-XB.1
N$32: DRIVE-YA.1 IC4.2 | length 270.7
  Top w40: IC4.2 2900,1650 2950,1700 DRIVE-YA.1
N$33: DRIVE-YB.1 IC4.6 | length 270.7
  Top w40: DRIVE-YB.1 2650,1700 2700,1650 IC4.6
N$34: DRIVE-ZA.1 IC5.2 | length 270.7
  Top w40: IC5.2 3950,1650 4000,1700 DRIVE-ZA.1
N$35: DRIVE-ZB.1 IC5.6 | length 270.7
  Top w40: DRIVE-ZB.1 3700,1700 3750,1650 IC5.6
N$36: C8.1 D5.K Y-DIR.9 | length 335.9
  Top w12: D5.K 1253,4084 C8.1@1315,4090
  Top w16: C8.1@1315,4090 Y-DIR.9@1460,4075
N$37: AXDRS453-LCC_Z-DIR.4 C12.2 | length 291.7
  Top w16: C12.2 1600,3017 AXDRS453-LCC_Z-DIR.4
N$38: AXDRS453-LCC_X-DIR.4 C22.2 | length 273.8
  Top w16: C22.2 1750,1359 1800,1350 AXDRS453-LCC_X-DIR.4
N$39: 
  other v4: 1200,1200
N$40: 
  other v4: 4350,1200
N$41: AXDRS453-LCC_Z-DIR.2 C19.2 | length 314.2
  Top w16: C19.2 1450,3000 1525,3125 1525,3246 AXDRS453-LCC_Z-DIR.2@1530,3250
N$43: 
N$44: AXDRS453-LCC_X-DIR.2 C23.2 | length 298.4
  Top w16: C23.2 1750,1500 1830,1421 AXDRS453-LCC_X-DIR.2@1900,1421
N$45: 
N$46: 
N$47: 
N$50: C34.1 U4.10 | length 325.6
  Top w10: U4.10@3404,3441 3566,3441 C34.1@3702,3532
N$51: C28.1 U4.8 | length 606.4
  Top w12: U4.8@3380,3397 3525,3325 3775,3400 C28.1@3805,3581
N$52: C28.2 U4.12 | length 449.1
  Top w12: U4.12 3550,3600 3678,3633 C28.2@3805,3648
N$61: D15.K PHOTO.11 | length 274.8
  Top w16: PHOTO.11 4162,2392 D15.K
N$62: D14.K PHOTO.9 | length 241.5
  Top w16: PHOTO.9 4187,2517 D14.K@4261,2425
N$63: D13.K PHOTO.7 | length 202.7
  Top w16: PHOTO.7 4187,2642 D13.K@4265,2592
N$64: D12.K PHOTO.5 | length 201.7
  Top w16: PHOTO.5 4262,2792 D12.K
N$65: D11.K PHOTO.3 | length 185.9
  Top w16: PHOTO.3 4162,2892 D11.K@4270,2925
PWM-X: IC6.3 U$1.42 | length 1225.7
  Top w12: IC6.3@1746,2338 1808,2375 1825,2400 v1(1850,2725) ; v1@2080,2755 v1(2075,2750) 2181,2856 U$1.42@2586,2856
  Bottom w16: v1(1850,2725) 1875,2750 v1(2075,2750)
PWM-Y: IC7.3 U$1.39 | length 1921.1
  Top w10: v1(2657,1934) 2683,1892 2708,1881 2763,1848 IC7.3@2763,1846
  Top w12: v1(2154,3029) 2268,2915 U$1.39@2586,2915
  Bottom w12: v1(2154,3029) 2624,2559 2624,2313 2620,2003 v1(2657,1934)
PWM-Z: IC8.3 U$1.43 | length 2828.9
  Top w12: v1(2125,2150) 2125,2701 2140,2715 2148,2724 2261,2837 U$1.43@2586,2837 ; v1(2351,2150) 3008,1950 3700,1950 3805,1846 IC8.3@3813,1846
  Bottom w12: v1(2125,2150) v1(2351,2150)
RESET_N: H1.11 JTAG.6 U$1.64 | length 5128.5
  Top w12: U$1.64@2963,2654 2997,2654 3144,2496 3219,2317 v2(3224,2295)
  Top w16: v2(3866,3021) 4066,3096 4141,3096 4289,3143 4289,3306 4203,3366 JTAG.6
  Bottom w10: 1968,3781 2024,3837 2024,4274 H1.11
  Bottom w12: 1968,3781 2003,3264 3039,2152 3174,2190 v2(3224,2295)
  Bottom w16: v2(3224,2295) 3457,2511 3557,2888 3690,3021 v2(3866,3021)
RX: U$1.54 X1.2 | length 1402.4
  Top w12: U$1.54 2766,2469 3039,2171 3559,2275 3735,2276 X1.2
SCK: AXDRS453-LCC_X-DIR.5 AXDRS453-LCC_Z-DIR.5 U$1.49 Y-DIR.16 | length 4926
  Top w12: v1(1675,1325) 1707,1319 AXDRS453-LCC_X-DIR.5@1900,1319 ; v1(2450,2462) 2475,2462 U$1.49@2668,2654
  Top w16: v1(1225,2900) 1600,2900 1625,2925 1625,2943 AXDRS453-LCC_Z-DIR.5 ; v1(1225,3700) 1350,3700 Y-DIR.16@1460,3725
  Bottom w10: v1(1225,2900) 1450,2750 1750,2750 1900,2600 1900,2450
  Bottom w12: v1(1675,1325) 1900,2450 v1(2450,2462)
  Bottom w16: v1(1225,2900) v1(1225,3700)
SCL: R13.1 U1.23 U2.14 U4.1 U$1.38 | length 3017.6
  Top w10: v1(2350,3475) 2663,3516 2746,3530 2898,3517 U4.1@3297,3480
  Top w12: v1(2300,3075) 2441,2935 U$1.38@2586,2935 ; U1.23@2830,3697 2830,3630 v1(2900,3550) ; v1(3200,3850) 3318,3943 U2.14@3325,3993
  Top w16: v1(2350,3475) 2350,3625 2431,3706 R13.1@2431,3902 ; 2898,3517 v1(2900,3550)
  Bottom w12: v1(2900,3550) 2975,3550 v1(3200,3850)
  Bottom w16: v1(2300,3075) v1(2350,3475)
SDA: R12.1 U1.24 U2.13 U4.16 U$1.37 | length 2819.7
  Top w10: v1(2395,3545) 2518,3574 ; R12.1@2430,4029 2518,3941 2518,3574 ; v1(2800,3575) 2525,3575 2518,3574 ; U1.24@2850,3697 2896,3650 v1(2950,3625) 3097,3579 U4.16@3321,3504 ; v1(3200,3950) 3236,3950 U2.13@3282,3997
  Top w12: v1(2375,3100) 2471,2955 U$1.37@2586,2955
  Bottom w10: v1(2375,3100) v1(2395,3545)
  Bottom w12: v1(2800,3575) v1(2950,3625) 3050,3750 v1(3200,3950)
TCK: JTAG.9 R4.1 U$1.1 | length 1941.8
  Top w12: U$1.1@3048,2738 3048,2696 v2(3130,2614)
  Top w16: R4.1@3834,3307 3909,3409 3989,3559 JTAG.9
  Bottom w16: v2(3130,2614) 3245,2931 3966,3566 JTAG.9
TDI: JTAG.1 R3.1 U$1.2 | length 1889.6
  Top w12: U$1.2@3048,2758 3171,2758 v2(3263,2412)
  Top w16: R3.1@3909,3099 3966,3135 JTAG.1
  Bottom w16: v2(3263,2412) 3406,2587 3491,2891 3792,3168 JTAG.1
TDO: JTAG.7 U$1.3 | length 1507.7
  Top w12: U$1.3@3048,2778 3204,2778 v2(3260,2647)
  Bottom w16: v2(3260,2647) 3316,2868 3670,3248 3923,3420 JTAG.7
TMS: JTAG.5 R2.1 U$1.4 | length 1796.1
  Top w12: U$1.4@3048,2797 3257,2797 v2(3332,2597)
  Top w16: R2.1@3907,3209 3980,3278 JTAG.5
  Bottom w16: v2(3332,2597) 3428,2895 3633,3150 3779,3264 3929,3358 JTAG.5
TX: U$1.53 X1.3 | length 1355.8
  Top w12: U$1.53@2747,2654 2747,2451 2991,2156 3077,2126 3252,2078 3629,2070 X1.3
pads on no net: H1.1 H1.2 H1.3 H1.4 H1.5 H1.6 H1.7 H1.8 H1.9 H1.10 H1.16 H1.17 H1.18 H1.19 H1.20 H1.21 H1.22 H1.23 H1.24 H1.25 H1.26 H1.27 H1.28 H1.29 H1.30 H1.31 H1.32 H1.33 H1.34 H1.35 H1.36 H1.37 H1.38 H1.39 H1.40 H1.41 H1.42 H1.43 H1.44 H1.45 H1.46 H1.47 H1.48 H1.49 H1.50 H1.51 H1.52 H2.1 H2.2 H2.3 H2.4 H2.5 H2.6 H2.7 H2.8 H2.9 H2.10 H2.11 H2.12 H2.13 H2.14 H2.15 H2.16 H2.17 H2.18 H2.19 H2.20 H2.21 H2.22 H2.23 H2.24 H2.31 H2.32 H2.33 H2.34 H2.35 H2.36 H2.37 H2.38 H2.39 H2.40 H2.41 H2.42 H2.43 H2.44 H2.45 H2.46 H2.47 H2.48 H2.49 H2.50 H2.51 H2.52 JTAG.3 JTAG.4 U1.2 U1.3 U1.4 U1.5 U1.6 U1.7 U1.12 U1.14 U1.15 U1.16 U1.17 U1.19 U1.21 U1.22 U2.3 U2.8 U2.9 U2.10 U2.11 U4.3 U4.5 U4.6 U4.7 U4.14 U$1.19 U$1.20 U$1.21 U$1.22 U$1.23 U$1.24 U$1.25 U$1.33 U$1.34 U$1.55 U$1.56 U$1.57 U$1.61 U$1.63

## Polygon pours and split planes (outlines as drawn)
GND on Top "Top-GND" (solid, remove dead copper, pour order 2): 1405,2405 1405,2045 1120,2045 1120,2405
GND on Top "Top-GND 1" (solid, remove dead copper, pour order 4): 2695,1195 3055,1195 3055,1505 2695,1505
GND on Top "Top-GND 2" (solid, remove dead copper, pour order 6): 3745,1195 4105,1195 4105,1505 3745,1505
3.3V on Top "Top-3.3V" (solid, remove dead copper, pour order 10): 1042,4208 4333,4208 4333,4158 4358,4158 4358,3658 4508,3658 4508,1542 2608,1542 2608,1142 2408,1142 2408,1042 1692,1042 1692,1142 1392,1142 1392,1342 1092,1342 1092,1958 1442,1958 1442,2492 1142,2492 1142,3442 1042,3442
GND on Bottom "Bottom-GND" (solid, remove dead copper, pour order 8): 988.25,4787.01 4557.99,4782.99 4562.01,976.05 992.01,980

## Silkscreen, mask and mechanical layers (free items; w line width, h text height)
Top Overlay:
  lines w10: 3980,2350 4097,2350 ; 4019,2373 4020,2335 4047,2352 4021,2372 ; 4054,2374 4055,2330
  lines w50: 1045,2463 1095,2463 ; 4150,4250 4150,4400
  text "ACS Board" at 3775,3802 h77.5
  text "20/10/2014" at 3884,3715 h77.5
  text "+ve -ve" at 3958.66,2396.97 h62
  text "Ver. 4" at 3247.67,1255.17 h77.5
  text "Designed by:" at 3182,1150.5 h77.5
  text "Lohmann, Irvin, Wright" at 3182,1073 h77.5
tNames:
  circle w16: c1399,3210 r8
  circle w16: c1816,1502 r8
  text "adxrs453-brgz" at 1550,4100 h37.2
  text "adxrs453-beyz" at 1374,3152 h37.2
  text "at32uc3c" at 2643,3051 h37.2
  text "adxrs453-beyz" at 1865,1548 h37.2
Milling:
  lines w10: 2450,4660 3175,4660 3175,4775 4000,4775 4000,4725 4371,4725 ; 2450,4661 2450,4775 1550,4775 1550,4725 1000,4725 1000,3250 1100,3250 1100,2550 1000,2550 1000,1050 1530,1050 1530,1000 2467,1000 2467,1115 3173,1115 3173,1000 4014,1000 4014,1050 4550,1050 4550,3871 4371,3871 4371,4726
Unrouted:
  lines w0: 1569,3368 1575,3374

## Dimensions
3800,3307 to 3874,3209 on tDocu

## Text inside footprints (layer, text, board x,y; h text height)
U1: tDocu "X" at 2756,3822 h24.8 r180; tDocu "Y" at 2848,3749 h24.8 r180; tDocu "Z" at 2800,3741 h24.8 r180
U2: tDocu "X" at 3315,4080 h18.6 r270; tDocu "Y" at 3315,4095 h18.6 r270; tDocu "Z" at 3330,4080 h18.6 r270